# EAGLE board DAU_Kupplung_1_phasig_V1_11 (EAGLE 6.1)
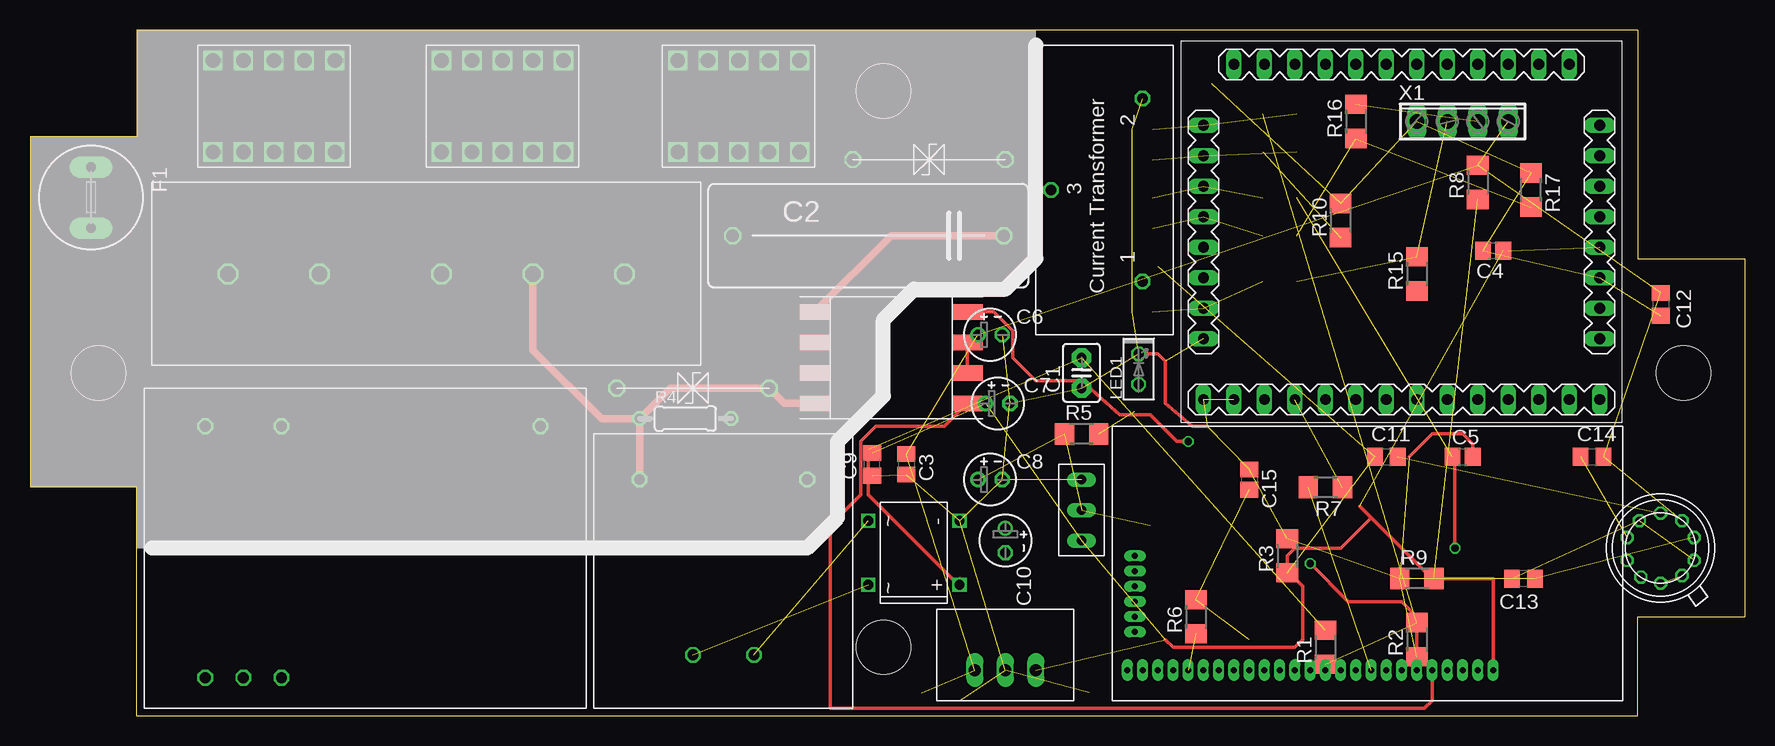
[diagram p0: board, top side]
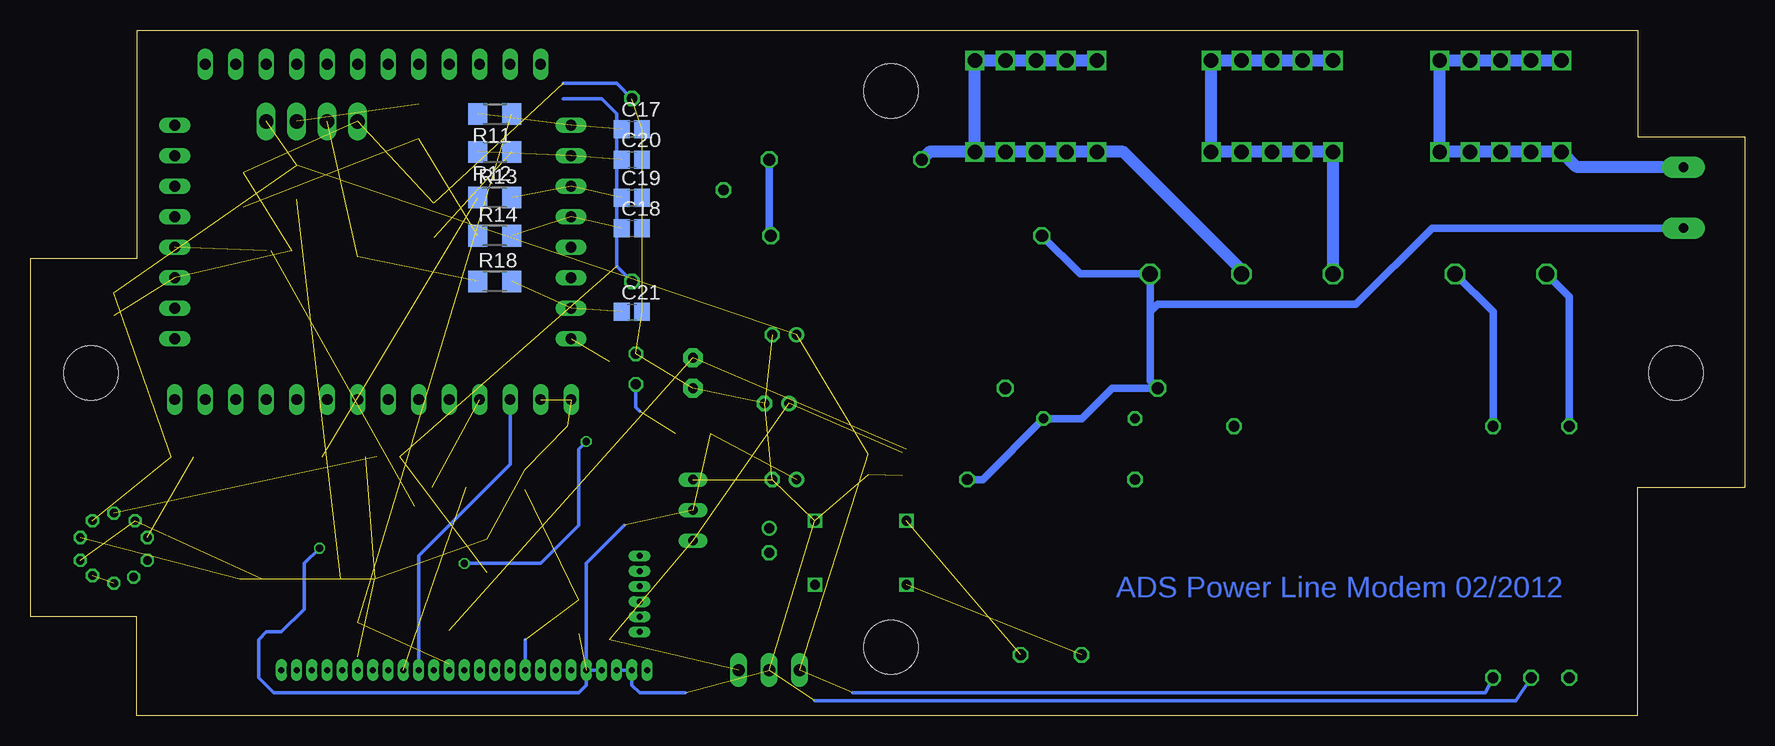
[diagram p1: board, bottom side, seen from below]

Size 142.88 x 57.15 mm. Coordinates in mm from the lower left corner, seen from the top.
Outline: 8.89,0 8.89,19.05 0,19.05 0,48.26 8.89,48.26 8.89,57.15 133.98,57.15 133.98,38.1 142.88,38.1 142.88,8.26 133.98,8.26 133.98,0 8.89,0
Copper layers (1*16): Top 0.035mm / dielectric 1.5mm / Bottom 0.035mm
Design rules: minimum track width 0.15mm, minimum drill 0.3mm, track to track 0.15mm, track to pad 0.15mm, pad to pad 0.15mm, via to via 0.15mm, smd to smd 0.15mm, copper to edge 0.3mm, drill to drill 0.2mm, minimum pad ring 0.2mm, minimum via ring 0.15mm, stop-mask expansion 0.075mm, vias tented up to drill 0mil, thermal gap 0.2mm
Holes 4.5 mm at 71.12,52.07 71.12,5.71 5.71,28.57 137.79,28.57

## Footprints (pad centres in the part's own frame; a part is rotated, then mirrored left to right if it is on the bottom)
AC1010 = drill 0.9 octagon: P$1 20.32,8.89; P$2 5.08,8.89; P$3 12.7,1.27
C2.5-3 = drill 0.813 pad 1.6 octagon: 1 -1.27,0; 2 1.27,0
C225-087X268 = drill 1.016 octagon: 1 -11.303,0; 2 11.303,0
C0805 = smd 1.3 x 1.5: 1 -0.85,0; 2 0.85,0
E2-4 = drill 0.813 pad 1.27: + -1.016,0 | drill 0.813 pad 1.27 octagon: - 1.016,0
C0805' = smd 1.3 x 1.5: 1 -0.95,0; 2 0.95,0
TR5 = drill 0.813 pad 1.778 long: 1 -2.54,0; 2 2.54,0
FASTON_DOUBLE = drill 1.2 square: P$1 -5.08,-3.81; P$2 -2.54,-3.81; P$3 -5.08,3.81; P$4 -2.54,3.81; P$5 0,3.81; P$6 2.54,3.81; P$7 5.08,3.81; P$8 0,-3.81; P$9 2.54,-3.81; P$10 5.08,-3.81
LED2X5 = drill 0.813 octagon: A -1.27,0; K 1.27,0
R1206 = smd 1.6 x 1.803: 1 -1.422,0; 2 1.422,0
0204/7 = drill 0.813 octagon: 1 -3.81,0; 2 3.81,0
RAC04_12SA = drill 0.9 octagon: +VO 25.4,24.13; GND 28.575,24.13; L 31.75,3.175; N 25.4,3.175; NC 3.81,3.175; NC1 31.75,24.13
TRAFO_0,35VA = drill 0.9 octagon: L 3.81,17.78; N 3.81,3.81; OUT1 18.415,13.335; OUT2 18.415,8.255
ADUC_MINIMUM = drill 0.9 long: ADC0 -9.207,-16.51; ADC1 -6.668,-16.51; ADC2 -4.128,-16.51; ADC3 -1.587,-16.51; ADC4 6.032,-16.51; ADC5 8.572,-16.51; ADC6 13.652,-16.51; ADC7 13.652,-13.97; ALE -14.287,6.35; DAC0 0.953,-16.51; DAC1 3.493,-16.51; GND 3.493,16.51; GND2 -4.128,16.51; GND3 -6.668,16.51; INT0 13.652,-6.35; MISO 13.652,-3.81; MOSI 13.652,11.43; P00 -14.287,3.81; P01 -14.287,1.27; P02 -14.287,-1.27; P03 -14.287,-3.81; P04 -14.287,-6.35; P05 -14.287,-8.89; P06 -14.287,-11.43; P07 -14.287,-13.97; P20 13.652,13.97; P21 13.652,16.51; P22 8.572,16.51; P23 6.032,16.51; P24 -9.207,16.51; P25 -14.287,13.97; P34 13.652,-1.27; P35 13.652,1.27; P36 13.652,3.81; P37 13.652,6.35; PWM0 -14.287,11.43; PWM1 -14.287,8.89; RXD 13.652,-11.43; SCLOCK 13.652,8.89; TXD 13.652,-8.89; VCC 0.953,16.51; VCC1 -1.587,16.51
IT800 = drill 0.5 long: 2AGND 2.54,2.54; 3GND 3.81,2.54; 4_33VAN 5.08,2.54; 5_33V 6.35,2.54; 5V 31.75,2.54; LINE1 25.4,2.54; LINE2 26.67,2.54; P$1 1.27,2.54; P$6 7.62,2.54; P$7 8.89,2.54; P$8 10.16,2.54; P$10 12.7,2.54; P$11 13.97,2.54; P$12 15.24,2.54; P$13 16.51,2.54; P$14 17.78,2.54; P$15 19.05,2.54; P$16 20.32,2.54; P$17 21.59,2.54; P$18 22.86,2.54; P$19 24.13,2.54; P$22 27.94,2.54; P$23 29.21,2.54; P$24 30.48,2.54; P$26 1.905,5.715; P$27 1.905,6.985; P$28 1.905,8.255; P$29 1.905,9.525; P$30 1.905,10.795; P$31 1.905,12.065; RESET 11.43,2.54
PLC-UEBERTRAGER_V2 = smd 2.54 x 1.27: 1LINE1 6.35,3.81; 2 6.35,1.27; 3 6.35,-1.27; 4LINE2 6.35,-3.81; 6NC -6.35,1.27; 7NC -6.35,-1.27; 8N -6.35,-3.81; L5 -6.35,3.81
TO100_10PIN = drill 0.7 octagon: 1 2.794,-1.016; 2 2.794,0.889; 3 1.778,2.286; 4 0,2.921; 5 -1.778,2.286; 6 -2.794,0.889; 7 -2.794,-1.016; 8 -1.651,-2.413; 9 0,-2.921; 10 1.778,-2.286
RECTIFIER = drill 0.8 square: + 6.858,7.62; - 1.524,7.62; ~1 1.524,0; ~2 6.858,0
TSV = drill 1 octagon: P$1 -5.08,0; P$2 7.62,0
TS1084_HOCH = drill 0.8 long: GND 0,0; IN 5.08,0; OUT 2.54,0
RECOM785X = drill 1 long: GND 0,2.54; VIN -2.54,2.54; VOUT 2.54,2.54
NETZFILTER = drill 1.3 octagon: L 6.35,7.62; L' 39.37,7.62; N 13.97,7.62; N' 31.75,7.62; PE 21.59,7.62
4POL254 = drill 1.2 long: 1 -3.81,0; 2 -1.27,0; 3 1.27,0; 4 3.81,0

## Placement (x,y rotation side)
AC1020  AC1010  [AC1010]  83.82,56.51 270 top
C1  1µ  [C2.5-3]  87.63,28.57 90 top
C2  [C225-087X268]  69.85,40 180 top
C3  [C0805]  73.03,20.96 270 top
C4  [C0805]  121.92,38.73 180 top
C5  [C0805]  119.38,21.59 0 top
C6  4µ7  [E2-4]  80.01,31.75 0 top
C7  4µ7  [E2-4]  80.65,26.04 0 top
C8  4µ7  [E2-4]  80.01,19.68 0 top
C9  100n  [C0805']  70.17,20.96 90 top
C10  4µ7  [E2-4]  81.28,14.61 270 top
C11  1µ  [C0805']  113.03,21.59 0 top
C12  0,1µ  [C0805']  135.89,34.29 270 top
C13  0,1µ  [C0805']  124.46,11.43 180 top
C14  4µ7  [C0805']  130.17,21.59 0 top
C15  1µ  [C0805]  101.6,19.68 270 top
C17  0,1µ  [C0805]  92.71,48.89 0 bottom
C18  0,1µ  [C0805]  92.71,40.64 0 bottom
C19  0,1µ  [C0805]  92.71,43.18 0 bottom
C20  0,1µ  [C0805]  92.71,46.35 0 bottom
C21  0,1µ  [C0805]  92.71,33.65 0 bottom
F1  T250V/250mA  [TR5]  5.08,43.18 270 top
L  PRINT_CONNECTOR  [FASTON_DOUBLE]  20.32,50.8 0 top
LED1  [LED2X5]  92.39,28.89 90 top
N  PRINT_CONNECTOR  [FASTON_DOUBLE]  59.05,50.8 180 top
PE  PRINT_CONNECTOR  [FASTON_DOUBLE]  39.37,50.8 180 top
R1  820k  [R1206]  107.95,5.71 90 top
R2  330k  [R1206]  115.57,6.35 90 top
R3  220R  [R1206]  104.78,13.34 90 top
R4  [0204/7]  54.61,24.77 0 top
R5  330R  [R1206]  87.63,23.5 0 top
R6  1M  [R1206]  97.16,8.26 90 top
R7  330R  [R1206]  107.95,19.05 180 top
R8  22k  [R1206]  120.65,44.45 90 top
R9  10k  [R1206]  115.57,11.43 0 top
R10  4k7  [R1206]  109.22,41.27 90 top
R11  10R  [R1206]  104.14,50.16 180 bottom
R12  10R  [R1206]  104.14,46.99 180 bottom
R13  10R  [R1206]  104.14,43.18 0 bottom
R14  10R  [R1206]  104.14,40 0 bottom
R15  220R  [R1206]  115.57,36.83 90 top
R16  680k  [R1206]  110.49,49.53 90 top
R17  470k  [R1206]  125.09,43.81 270 top
R18  10R  [R1206]  104.14,36.2 0 bottom
U$1  RECOM_RAC04_12SA  [RAC04_12SA]  46.35,27.3 180 top
U$2  SICHERHEITSTRAFO  [TRAFO_0,35VA]  46.99,23.5 270 top
U$3  ADUC831_MINIMUM  [ADUC_MINIMUM]  114.3,40 270 top
U$4  IT800  [IT800]  90.17,1.27 0 top
U$5  PLC_UEBERTRAGER_V2  [PLC-UEBERTRAGER_V2]  71.76,29.84 0 top
U$7  AD536  [TO100_10PIN]  135.89,13.97 0 top
U$8  RECTIFIER  [RECTIFIER]  69.85,17.78 270 top
U$9  TSV  [TSV]  53.97,27.3 0 top
U$10  TS1084_HOCH  [TS1084_HOCH]  87.63,19.68 270 top
U$11  RECOM_785_05  [RECOM785X]  81.28,1.27 0 top
U$12  TSV  [TSV]  76.2,46.35 180 top
U$13  NETZFILTER_05_A  [NETZFILTER]  55.88,44.45 180 top
X1  [4POL254]  119.38,49.53 0 top

## Library data of the parts
AC1020 L N PE U$1 U$2 U$4 U$7-U$13 = ADS
C1 = capacitor-wima
C2-C5 C15 C17-C21 R1-R18 = resistor
C6-C14 = rcl
F1 = fuse; OC_FARNELL: unknown; OC_NEWARK: unknown
LED1 = led
U$3 = ADS_ADUCBoards
U$5 = ADS1
X1 = con-phoenix-254; OC_FARNELL: unknown; OC_NEWARK: unknown

## Nets
+3V3: C5.1 C8.+ R5.1 R6.1 R13.1 U$4.4_33VAN U$4.5_33V U$10.OUT
+5V: C4.1 C7.+ C9.2 U$3.VCC U$4.5V U$10.IN U$11.VOUT
+12V: C3.1 C6.+ C12.1 C14.2 R8.2 U$1.+VO U$7.3 U$11.VIN X1.4
ADC0: R1.1 R2.2 R11.1
ADC1: R10.1 R12.1
GND: AC1020.P$2 C1.1 C3.2 C4.2 C5.2 C6.- C7.- C8.- C9.1 C12.2 C13.2 C15.1 C17.2 C18.2 C19.2 C20.2 C21.2 LED1.K R2.1 R3.2 R9.1 R10.2 R17.1 U$1.GND U$3.ADC5 U$3.ADC6 U$3.ADC7 U$3.GND U$4.2AGND U$4.3GND U$7.1 U$7.5 U$8.- U$10.GND U$11.GND X1.1
N$1: U$5.2 U$5.3
N$2: U$7.9 U$7.10
N$3: R7.2 U$4.P$17
N$4: U$2.OUT1 U$8.~1
N$5: U$4.LINE1 U$5.1LINE1
N$6: F1.1 L.P$1 L.P$2 L.P$3 L.P$4 L.P$5 L.P$6 L.P$7 L.P$8 L.P$9 L.P$10
N$7: C1.2 R1.2 U$8.+
N$8: AC1020.P$1 C11.1 R3.1
N$9: U$2.OUT2 U$8.~2
N$10: C11.2 U$7.4
N$11: C2.1 U$5.L5 U$12.P$1
N$12: C2.2 F1.2 R4.2 U$2.L U$9.P$1 U$13.L
N$13: U$4.LINE2 U$5.4LINE2
N$14: R7.1 U$3.TXD
N$15: U$3.RXD U$4.P$16
N$16: C14.1 U$7.6
N$17: C21.1 R18.2 U$3.ADC4
N$18: N.P$1 N.P$2 N.P$3 N.P$4 N.P$5 N.P$6 N.P$7 N.P$8 N.P$9 N.P$10 R4.1 U$2.N U$5.8N U$9.P$2 U$12.P$2 U$13.N
N$19: LED1.A R5.2
N$20: C15.2 R6.2 U$4.RESET
N$21: C13.1 R8.1 R9.2 U$7.2
N$24: U$1.L U$13.L'
N$25: U$1.N U$13.N'
N$27: C18.1 R14.2 U$3.ADC3
N$28: C19.1 R13.2 U$3.ADC2
N$29: C20.1 R12.2 U$3.ADC1
N$30: C17.1 R11.2 U$3.ADC0
N$31: R15.2 R18.1 X1.2
N$32: R16.2 X1.3
N$33: R14.1 R16.1 R17.2
PE: PE.P$1 PE.P$2 PE.P$3 PE.P$4 PE.P$5 PE.P$6 PE.P$7 PE.P$8 PE.P$9 PE.P$10 U$13.PE

## Tracks (layer width: path | path; a pad name or v marks a point on that pad's centre or on a via)
+3V3  (via drill 0.6)  (5 unrouted)
  Top 0.305: C5.1 118.75,21.38 v118.75,13.97
  Bottom 0.305: U$4.5_33V U$4.4_33VAN | 93.34,15.88 96.52,12.7 U$4.5_33V | v118.75,13.97 120.02,12.7 120.02,8.89 121.92,6.99 123.19,6.99 123.83,6.35 123.83,3.18 122.56,1.9 97.16,1.9 96.52,2.54 U$4.5_33V
+5V  (6 unrouted)
  Top 0.305: 122.14,3.6 U$4.5V 121.92,11.43 116.84,11.43 111.76,16.51 | C4.1 123.19,38.73 123.19,39.05 | 94.62,6.35 95.25,5.71 105.41,5.71 106.05,6.35 106.05,10.79 104.78,12.07 104.78,13.34 105.41,13.97 109.22,13.97 111.76,16.51 | 111.76,16.51 110.81,17.46
+12V  (8 unrouted)
  Bottom 0.305: U$1.+VO 21.59,1.9 74.3,1.9
ADC0  (2 unrouted)
ADC1  (1 unrouted)
GND  (34 unrouted)
  Top 0.305: 120.02,21.59 C5.2 120.23,22.64 119.38,23.5 116.84,23.5 114.94,21.59 | LED1.K 93.98,30.16 94.62,29.53 94.62,26.04 96.84,24.13 98.11,24.13
  Bottom 0.305: AC1020.P$2 93.98,52.7 98.42,52.7 | 88.27,1.9 92.08,1.9 92.71,2.54 U$4.2AGND U$4.3GND | U$1.GND 19.05,1.27 77.47,1.27
N$1
  Top 0.305: U$5.3 U$5.2
N$2  (1 unrouted)
N$3  (1 unrouted)
N$4  (1 unrouted)
N$5  (via drill 0.6)
  Top 0.305: v106.68,12.7 109.86,9.53 114.3,9.53 115.57,8.26 U$4.LINE1 | U$5.1LINE1 80.33,33.65 81.92,32.07 81.92,29.84 83.82,27.94 87.63,27.94 90.49,25.4 90.81,25.08 93.34,25.08 95.57,22.86 v96.52,22.86
  Bottom 0.305: v96.52,22.86 97.16,22.23 97.16,15.88 100.33,12.7 v106.68,12.7
N$6
  Bottom 1.016: F1.1 13.97,45.72 L.P$1 L.P$2 L.P$8 L.P$9 L.P$10 L.P$7 L.P$6 L.P$5 L.P$4 L.P$3
N$7  (2 unrouted)
  Top 0.305: 77.47,11.43 U$8.+ 77.34,10.92 69.85,18.41 69.85,22.23
N$8  (2 unrouted)
  Bottom 0.305: AC1020.P$1 93.98,37.46 93.98,50.16 95.25,51.43 98.42,51.43
N$9  (1 unrouted)
N$10  (1 unrouted)
N$11
  Top 0.61: C2.1 71.76,40 U$5.L5
  Bottom 0.61: U$12.P$1 81.28,40.13 C2.1
N$12
  Bottom 0.61: 49.53,33.65 U$13.L 55.37,36.83 C2.2 | 49.53,33.65 49.53,27.94 U$9.P$1 52.7,27.3 55.24,24.77 R4.2 63.5,19.68 U$2.L | F1.2 26.04,40.64 32.38,34.29 48.89,34.29 49.53,33.65
N$13
  Top 0.305: U$5.4LINE2 76.2,24.13 70.48,24.13 69.22,22.86 69.22,18.41 66.67,15.88 66.67,0.64 116.2,0.64 116.84,1.27 U$4.LINE2
N$14  (1 unrouted)
N$15
  Bottom 0.305: U$4.P$16 110.49,13.34 102.87,20.96 U$3.RXD
N$16  (1 unrouted)
N$17  (2 unrouted)
N$18
  Top 0.61: U$13.N 41.91,30.48 47.62,24.77 R4.1 | R4.1 U$2.N | R4.1 53.34,27.3 U$9.P$2 62.87,26.04 U$5.8N
  Bottom 1.016: U$13.N 41.91,37.15 51.75,46.99 N.P$7 N.P$6 N.P$5 N.P$4 N.P$3 | N.P$3 67.95,46.99 U$12.P$2 | N.P$3 N.P$1 N.P$2 N.P$8 N.P$9 N.P$10
N$19  (1 unrouted)
  Bottom 0.305: 92.08,25.4 92.39,25.72 LED1.A
N$20  (2 unrouted)
  Bottom 0.305: 101.6,6.35 U$4.RESET
N$21  (3 unrouted)
N$24
  Bottom 0.61: U$1.L 14.61,34.92 U$13.L'
N$25
  Bottom 0.61: U$1.N 20.96,33.65 U$13.N'
N$27  (2 unrouted)
N$28  (2 unrouted)
N$29  (2 unrouted)
N$30  (2 unrouted)
N$31  (2 unrouted)
N$32  (1 unrouted)
N$33  (2 unrouted)
PE
  Bottom 1.016: U$13.PE PE.P$7 PE.P$6 | 37.15,46.67 PE.P$6 | PE.P$6 PE.P$5 PE.P$4 PE.P$3 PE.P$1 PE.P$2 PE.P$8 PE.P$9 PE.P$10

## Text on the board
Bottom: ADS Power Line Modem 02/2012